# Altium PCB Station-Link.PcbDoc
Units mm, origin at the board's own origin, x right, y up, seen from the top; angles counter-clockwise.
Board outline 84 x 55 mm, 2 copper layers (Top Layer, Bottom Layer); 40 components, 35 nets, 165 pads, 35 vias.
Unrouted connection lines stored in the file: 1.
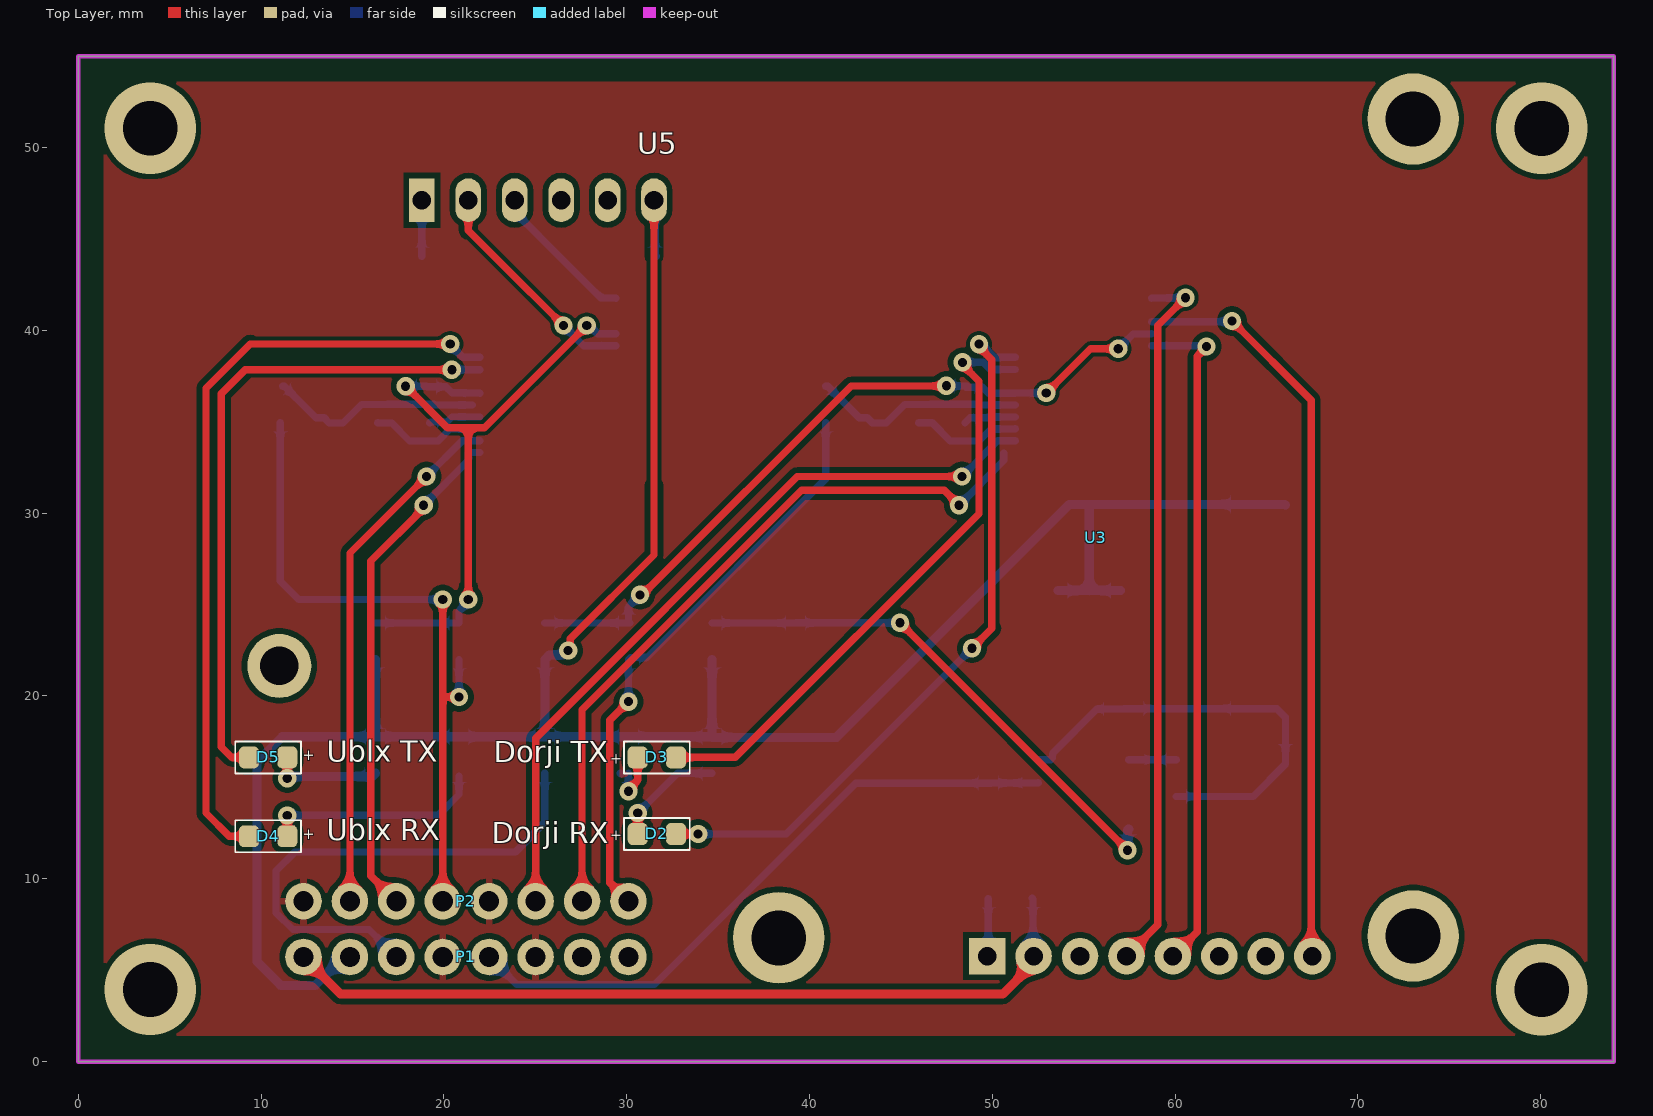
[diagram p0: Top Layer view]
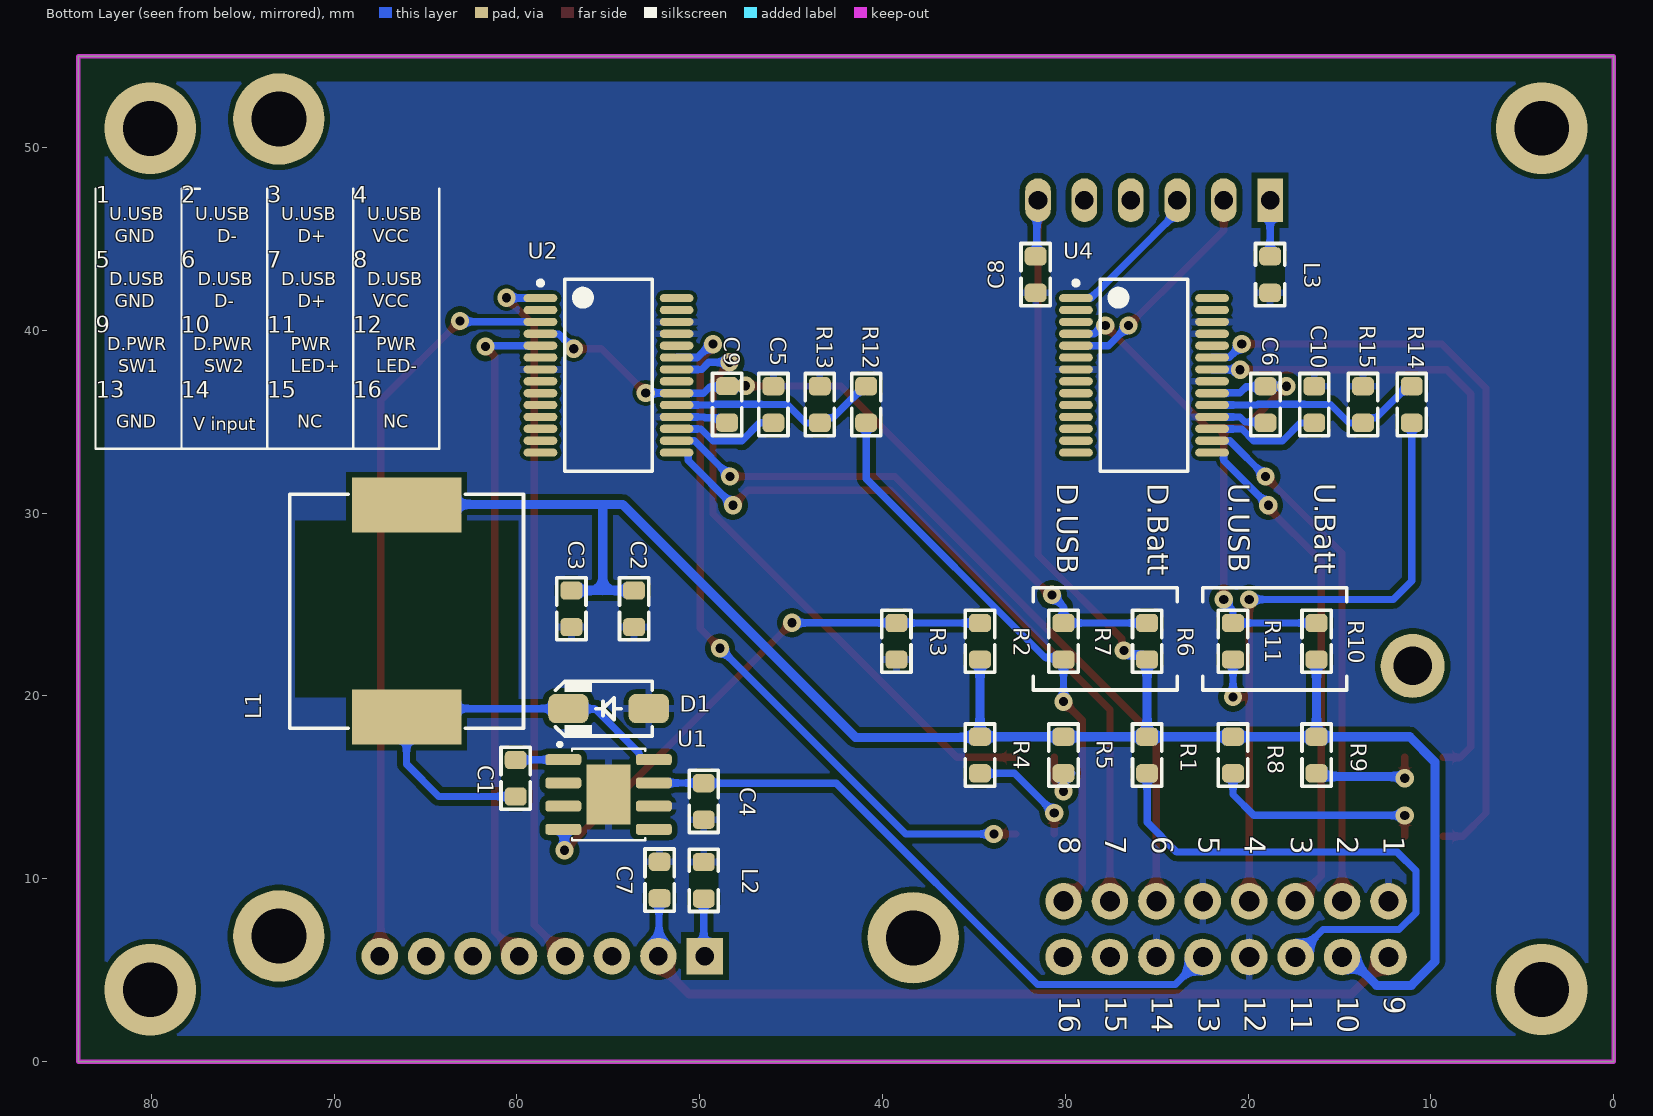
[diagram p1: Bottom Layer view, seen from below]
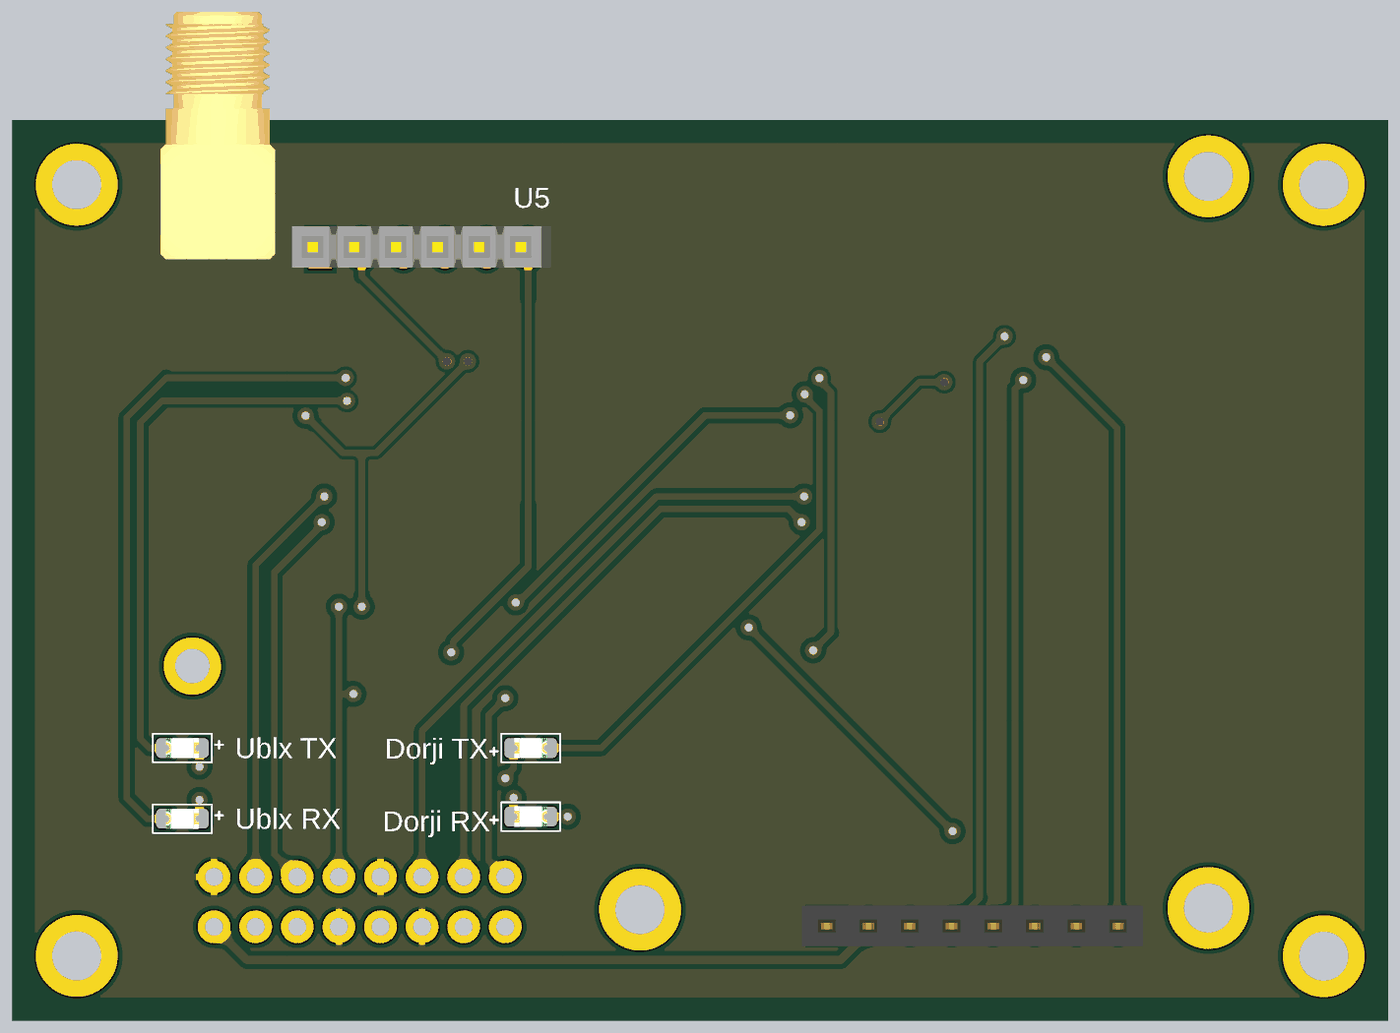
[diagram p2: 3D render of the assembled board from above, using the file's embedded part models]
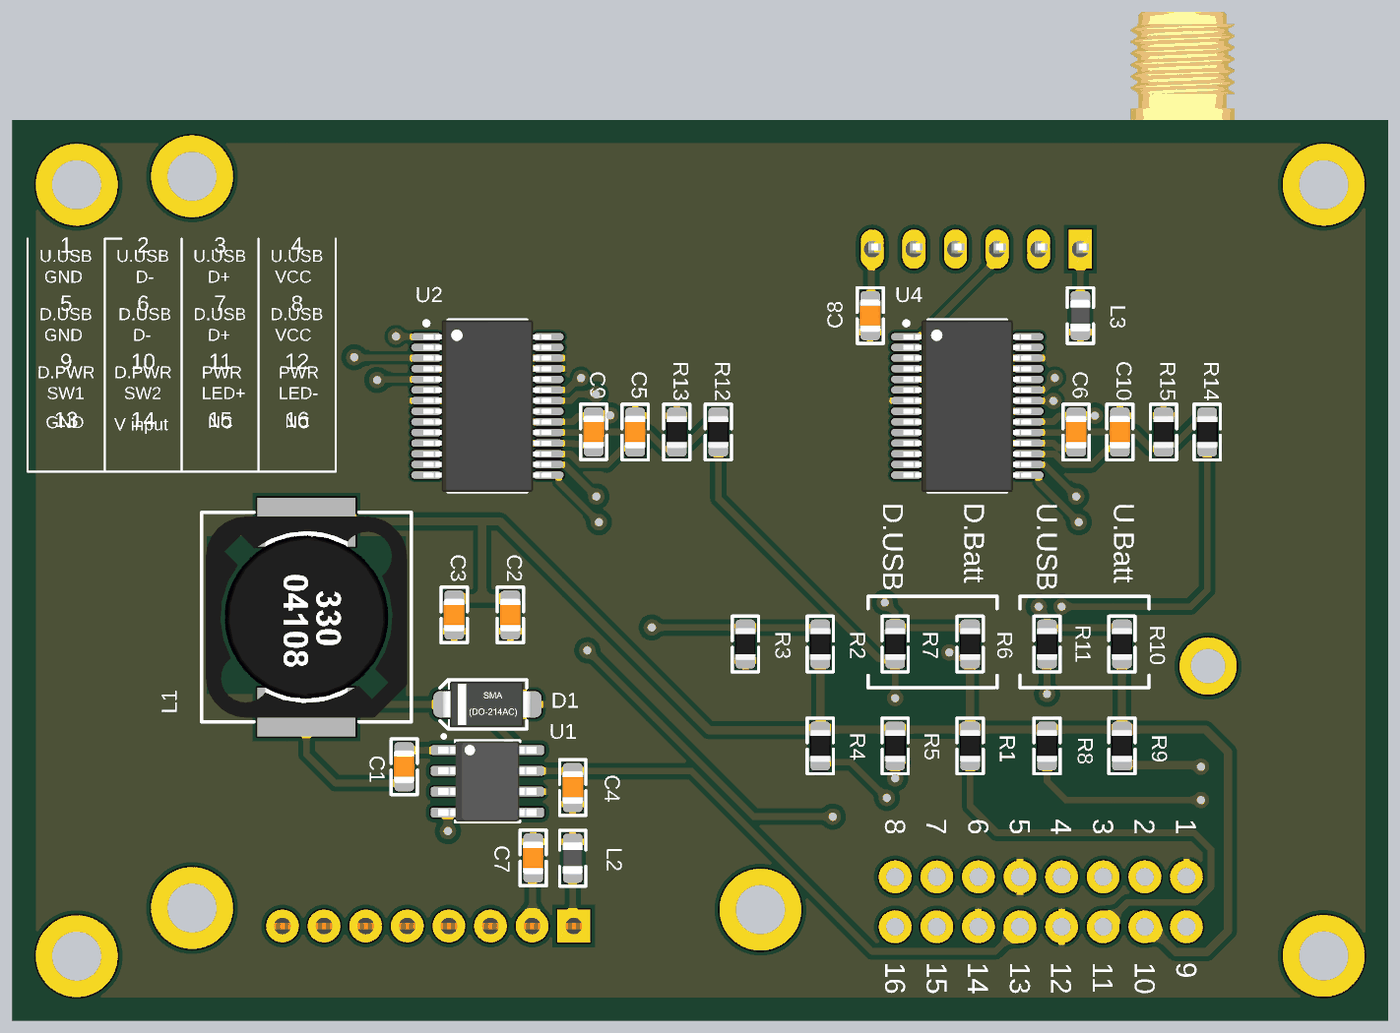
[diagram p3: 3D render of the assembled board from below, using the file's embedded part models]

## Layer stack, top to bottom
Top Solder: solder mask 0.0102, Solder Resist, Dk 3.5
Top Layer: signal copper 0.0356
Dielectric 1: dielectric 0.32, FR-4, Dk 4.8
Bottom Layer: signal copper 0.0356
Bottom Solder: solder mask 0.0102, Solder Resist, Dk 3.5

## Board outline
0,-0.009 0,54.991 84,54.991 84,-0.009

## Design rules (kind name [scope] priority, off if disabled: settings)
Clearance Clearance_1 [TouchesRoom('FT232-1','FT232-2')] p1: gap=0.2 ignorepadtopadclearanceinfootprint=TRUE
Clearance [All] p2: gap=0.3 ignorepadtopadclearanceinfootprint=TRUE
PolygonConnect [All] p1: connectstyle=Relief reliefconductorwidth=0.4 reliefentries=4 polygonreliefangle="90 Angle" airgapwidth=0.254
RoomDefinition FT232-2 [False] p1: confinementstyle=ConfineIn formatcopy=TRUE lockcomponents=FALSE outline 48.641,43.942 60.706,43.942 60.706,31.242 48.641,31.242
RoomDefinition FT232-1 [False] p2: confinementstyle=ConfineIn formatcopy=TRUE lockcomponents=FALSE outline 19.939,44.069 31.877,44.069 31.877,31.496 19.939,31.496
RoutingVias [All] p1: holewidth=0.5 width=1 viastyle="Through Hole" minholewidth=0.5 minwidth=1 maxholewidth=0.5 maxwidth=1
SolderMaskExpansion [All] p1: expansion=0.102 istentingtop=FALSE
Width [All] p1: maxlimit=1 minlimit=0.4 preferedwidth=0.5
30 further rules are at their usual default settings.

## Components (designator, comment, footprint, x,y, rotation, side; value= is the part's Value field where it differs from the comment)
C1 "10nF" C0805 60.071,15.494 r90 bottom
C2 "6.8uF" C0805 53.594,24.765 r90 bottom
C3 "6.8uF" C0805 57.023,24.765 r90 bottom
C4 "10uF" C0805 49.784,14.224 r270 bottom
C5 "0.1uF" C0805 45.974,35.941 r270 bottom
C6 "0.1uF" C0805 19.05,35.941 r90 bottom
C7 "0.1uF" C0805 52.197,9.922 r270 bottom
C8 "0.1uF" C0805 31.623,43.053 r90 bottom
C9 "0.1uF" C0805 48.506,35.949 r90 bottom
C10 "0.1uF" C0805 16.383,35.941 r270 bottom
D1 "1N5822" D_SMA_214AC 54.991,19.304 r0 bottom
D2 "LED_Orange" LED_0805 31.651,12.446 r180 top
D3 "LED_Green" LED_0805 31.651,16.637 r180 top
D4 "LED_Orange" LED_0805 10.386,12.319 r0 top
D5 "LED_Green" LED_0805 10.386,16.637 r0 top
L1 "470uH" RH127_L_12*12*8 66.04,24.638 r90 bottom
L2 "HZ0805G471R-10" IND_HZ0805G471R-10 49.784,9.906 r90 bottom
L3 "HZ0805G471R-10" IND_HZ0805G471R-10 18.796,43.053 r270 bottom
P1 "Header 9" "HEADER 9" 55.753,28.067 r180 top
P2 "Header 9" "HEADER 9" 55.753,31.115 r180 top
R1 "1.5k" R0805 25.527,16.764 r90 bottom
R2 "10K" R0805 34.671,22.987 r270 bottom
R3 "3.24K" R0805 39.243,22.987 r90 bottom
R4 "1.5K" R0805 34.671,16.764 r270 bottom
R5 "1.5K" R0805 30.099,16.764 r270 bottom
R6 "0R" R0805 25.527,22.987 r270 bottom
R7 "0R" R0805 30.099,22.987 r90 bottom
R8 "1.5K" R0805 20.828,16.764 r270 bottom
R9 "1.5K" R0805 16.256,16.764 r270 bottom
R10 "0R" R0805 16.256,22.987 r270 bottom
R11 "0R" R0805 20.828,22.987 r90 bottom
R12 "4.7K" R0805 40.894,35.941 r90 bottom
R13 "10K" R0805 43.434,35.941 r90 bottom
R14 "4.7K" R0805 11.049,35.941 r90 bottom
R15 "10K" R0805 13.716,35.941 r90 bottom
U1 "TPS5430DDAR" SOIC8E 54.991,14.605 r180 bottom
U2 "FT232RL" FTDI-SSOP-28_M 54.991,37.536 r180 bottom locked
U3 "DRF7020D27" DRF7020D27 38.305,6.737 r0 top locked
U4 "FT232RL" FTDI-SSOP-28_M 25.696,37.536 r180 bottom
U5 "UBLOX NEO-M8N" "UBLOX NEO-M8N - customized" 21.246,34.355 r180 top locked

## Footprints (in the part's own frame and the unit in brackets; to place one, negate y for a bottom-side part, rotate by r counter-clockwise, add the part's x,y. Pads: shape width x height; smd on the part's side, far side on the other; paste and mask are expansions set on the pad)
C0805 [mm] "CHIP Capacitor, 2.0X1.3mm, 0805"
  rrect50% 1x1.2 smd mask+0.075: 1(-1,0) 2(1,0)
  Top Layer pour cut-out: -0.5,0.8 0.5,0.8 0.5,-0.8 -0.5,-0.8
  silkscreen extent -1.7,-0.8 1.7,0.8, body extent -1.02,-0.63 1.02,0.64, height 0.65
D_SMA_214AC [mm] "SMA Molded Diode, 2-Leads, Body 4.3x2.7mm"
  rrect50% 2.2x1.6 smd: 1(-2.2,0) 2(2.2,0)
  silkscreen extent -2.4,-1.5 2.9,1.5, body extent -2.7,-1.4 2.8,1.4, height 2.6
DRF7020D27 [mm]
  rect 2x2 hole 1.02: 1(11.42,-0.975)
  round 2 hole 1.02: 2(13.96,-0.975) 3(16.5,-0.975) 4(19.04,-0.975) 5(21.58,-0.975) 6(24.12,-0.975) 7(26.66,-0.975) 8(29.2,-0.975)
  round 5 hole 3: ""(0.02,0.025) ""(34.72,0.125) ""(34.72,44.825)
  body extent -2.5,-2.52 37.5,55.75, height 12.54
FTDI-SSOP-28_M [mm] "SOP, 28-Leads, Body 10.5x5.6mm, Pitch 0.65mm, IPC Low Density"
  oval 1.85x0.45 smd: 1(-3.725,4.225) 2(-3.725,3.575) 3(-3.725,2.925) 4(-3.725,2.275) 5(-3.725,1.625) 6(-3.725,0.975) 7(-3.725,0.325) 8(-3.725,-0.325) 9(-3.725,-0.975) 10(-3.725,-1.625) 11(-3.725,-2.275) 12(-3.725,-2.925) 13(-3.725,-3.575) 14(-3.725,-4.225) 15(3.725,-4.225) 16(3.725,-3.575) 17(3.725,-2.925) 18(3.725,-2.275) 19(3.725,-1.625) 20(3.725,-0.975) 21(3.725,-0.325) 22(3.725,0.325) 23(3.725,0.975) 24(3.725,1.625) 25(3.725,2.275) 26(3.725,2.925) 27(3.725,3.575) 28(3.725,4.225)
  silkscreen extent -3.85,-5.25 2.4,5.25, body extent -3.9,-5.25 3.9,5.25, height 2
"HEADER 9" [mm]
  round 2 hole 1.1: 1(25.654,22.352) 2(28.194,22.352) 3(30.734,22.352) 4(33.274,22.352) 5(35.814,22.352) 6(38.354,22.352) 7(40.894,22.352) 8(43.434,22.352)
IND_HZ0805G471R-10 [mm]
  rrect50% 1x1.2 smd mask+0.075: 1(-1,0) 2(1,0)
  Top Layer pour cut-out: -0.5,0.8 0.5,0.8 0.5,-0.8 -0.5,-0.8
  silkscreen extent -1.7,-0.8 1.7,0.8, body extent -1,-0.63 1,0.63, height 1.05
LED_0805 [mm] "SMD Mono-color Chip LED, body 2.0x1.25mm"
  rrect50% 1.1x1.2 smd: 1(-1.05,0) 2(1.05,0)
  silkscreen extent -1.8,-0.87 1.8,0.87, body extent -1,-0.63 1,0.62, height 0.7
R0805 [mm] "CHIP RESISTOR 1/8 WATT ,2.0X1.3mm, 0805, 2012"
  rrect50% 1x1.2 smd mask+0.05: 1(-1,0) 2(1,0)
  Top Layer pour cut-out: -0.5,0.8 0.5,0.8 0.5,-0.8 -0.5,-0.8
  silkscreen extent -1.7,-0.8 1.7,0.8, body extent -1.02,-0.63 1.02,0.64, height 0.6
RH127_L_12*12*8 [mm] "INDUCTOR, 13.5x12.5mm, DR125, CDRH127, D128C 931AS"
  rect 3x6 smd: 1(-5.8,0) 2(5.8,0)
  Top Layer pour cut-out: -4.699,6.096 4.953,6.096 4.953,-6.096 -4.699,-6.096
  silkscreen extent -6.4,-6.4 6.4,6.4, body extent -6.16,-6.15 6.16,6.15, height 8.16
SOIC8E [mm]
  rrect54% 1.97x0.6 smd: 1(-2.475,1.905) 2(-2.475,0.635) 3(-2.475,-0.635) 4(-2.475,-1.905) 5(2.475,-1.905) 6(2.475,-0.635) 7(2.475,0.635) 8(2.475,1.905)
  rect 2.41x3.3 smd paste-3: 9(0,0)
  silkscreen extent -2.77,-2.5 2,2.84, body extent -3,-2.45 3,2.45, height 1.7
"UBLOX NEO-M8N - customized" [mm]
  rect 1.4x2.4 hole 1.02: 1(2.45,-12.762)
  oval 1.4x2.4 hole 1.02: 2(-0.09,-12.762) 3(-2.63,-12.762) 4(-5.17,-12.762) 5(-7.71,-12.762) 6(-10.25,-12.762)
  round 3.5 hole 2.1: ""(10.25,12.712)
  body extent -12.25,-27.25 12.75,15.21, height 22.36

## Part data
C1 C2 C3 C4 C5 C6 C7 C8 C9 C10: library part "CAP SMD 0805", "CAP 0805", BHK_Group=Capacitor, BHK_NC=no, BHK_SUB_Group=C_805, Data=16-12-2016, Desc.="CAP SMD 0805", Designer="Abbas Basereh"
  C1: BHK_Name=10nF
  C2 C3: BHK_Name=6.8uF
  C4: BHK_Name=10uF
  C5 C6 C7 C8 C9 C10: BHK_Name=0.1uF
D1: library part "1N5819 SMD", "Schottky Rectifiers", Manufacturer="ON Semiconductor/Fairchild", BHK_Group=Diod, BHK_Name=1N5819, BHK_NC=no, BHK_SUB_Group=Shotcky, Data=16-12-2016, Designer="Abbas Basereh", Link=https://www.aliexpress.com/item/Free-shipping-100pcs-1n5822-sma-smd-do-214ac-Schottky-diode-ss34/32337482329.html?spm=2114.01010208.3.1.zLZDsP&ws_ab_test=searchweb0_0,searchweb201602_4_10065_10068_10084_10083_10080_10082_10081_10060_10061_10062_10056_10055_10054_10059_10099_10078_10079_427_10073_10103_10102_10096_10052_10050_10051,searchweb201603_4&btsid=6e50dc92-ac69-45bc-a19e-209af19ce602, Part. No=SS34
D2 D4: library part "LED 0805 Orange", "SMT Mono-color Chip LED Waterclear WL-SMCW, size 0805, Amber, 2 V, 140 deg, 130 mcd", Emitting Color=Amber, Forward Voltage="2 V", Operating Temperature="-40 to 85 degC", Part Number=150080AS75000, BHK_Group=Public_PCB, BHK_Name=Orange, BHK_NC=no, BHK_SUB_Group=LED_805, Chip Technology=AlInGaP, ComponentLink1Description=Manufacturer, ComponentLink1URL=http://www.we-online.de, ComponentLink2Description=Datasheet, ComponentLink2URL=https://katalog.we-online.de/led/datasheet/150080AS75000.pdf, Dominant Wavelength="605 nm", Luminous Intensity="130 mcd", Mounting Technology=SMT, Packaging="Tape and Reel", Peak Wavelength="610 nm", Published Date="November 2018", Publisher="Wurth Elektronik", Size=0805, Viewing Angle="140 deg"
D3 D5: library part "LED 0805 Green", "SMT Mono-color Chip LED Waterclear WL-SMCW, size 0805, Green, 3.2 V, 140 deg, 450 mcd", Emitting Color=Green, Forward Voltage="3.2 V", Operating Temperature="-40 to 85 degC", Part Number=150080GS75000, BHK_Group=Public_PCB, BHK_Name=Green, BHK_NC=no, BHK_SUB_Group=LED_805, Chip Technology=InGaN, ComponentLink1Description=Manufacturer, ComponentLink1URL=http://www.we-online.de, ComponentLink2Description=Datasheet, ComponentLink2URL=https://katalog.we-online.de/led/datasheet/150080GS75000.pdf, Dominant Wavelength="525 nm", Luminous Intensity="450 mcd", Mounting Technology=SMT, Packaging="Tape and Reel", Peak Wavelength="515 nm", Published Date="November 2018", Publisher="Wurth Elektronik", Size=0805, Viewing Angle="140 deg"
L1: library part Inductor, "Inductor", BHK_Group=Self, BHK_Name=33UH, BHK_NC=no, BHK_SUB_Group=Other_Self, Code_IEC=1005, Code_JEITA=0402, LatestRevisionDate=29-May-2009, LatestRevisionNote="IPC-7351 Footprint Added.", PackageDescription="Chip Inductor", PackageReference=0402-A, Published=8-Jun-2000, Publisher="Altium Limited"
L2 L3: "470 Ohms @ 100 MHz 1 Power, Signal Line Ferrite Bead 0805 (2012 Metric) 1A 200mOhm", Package="0805 Laird", Check_prices=https://www.snapeda.com/parts/HZ0805G471R-10/Laird-Signal+Integrity+Products/view-part/?ref=eda, MF="Laird-Signal Integrity", MP=HZ0805G471R-10, SnapEDA_Link=https://www.snapeda.com/parts/HZ0805G471R-10/Laird-Signal+Integrity+Products/view-part/?ref=snap
R1 R2 R3 R4 R5 R6 R7 R8 R9 R10 R11 R12 R13 R14 R15: library part "RES 0805", "Resistor", BHK_Group=Resistor, BHK_NC=no, BHK_SUB_Group=R_805, Data=16-12-2016, Desc.="RES SMD 0805", Designer="Abbas Basereh"
  R1: BHK_Name=1.5k
  R2 R13 R15: BHK_Name=10K
  R3: BHK_Name=3.24K
  R4 R5 R8 R9: BHK_Name=1.5K
  R6 R7 R10 R11: BHK_Name=0R
  R12 R14: BHK_Name=4.7K
U1: "Texas Instruments, TPS5430DDAR Step-Down Switching Regulator 3A Adjustable, 1.22  31 V, 8-Pin SOIC", Manufacturer_Name="Texas Instruments", Mouser Part Number=595-TPS5430DDAR, Arrow Part Number=TPS5430DDAR, Arrow Price/Stock=https://www.arrow.com/en/products/tps5430ddar/texas-instruments?region=nac, BHK_Group=IC, BHK_Name=TPS5430DDAR, BHK_NC=No, BHK_SUB_Group=Regulator, Datasheet Link=http://www.ti.com/lit/gpn/tps5430, Geometry.Height=1.7mm, Manufacturer_Part_Number=TPS5430DDAR, Mouser Price/Stock=https://www.mouser.co.uk/ProductDetail/Texas-Instruments/TPS5430DDAR?qs=zwk82MlA57ZJdOTovH1aYA%3D%3D
U2 U4: library part CMP-2000-05029-1, "IC USB FS SERIAL UART 28-SSOP", Manufacturer=FTDI, Maximum Operating Temperature=+85degC, Minimum Operating Temperature=-40degC, Package Type=SSOP, Datasheet URL=http://datasheet.octopart.com/FT232RL-FTDI-datasheet-120501.pdf, Datasheet Version="Rev. 1.04, 02/2006", Dimensions=10.2x5.3x1.75mm, Height=1.75mm, Length=10.2mm, Manufacturer URL=http://www.ftdichip.com/, Maximum Data Rate=3MBd, Mounting Type=SurfaceMount, Number of Channels per Chip=1, Pin Count=28, Receive FIFO=256B, Transmit FIFO=128B, Width=5.3mm
U3: "DRF7020D27 is a low-cost sub-1 GHz transceiver module", BHK_Group=Module, BHK_Name=DRF7020D27, BHK_NC=NO, BHK_SUB_Group=RF
U5: library part "UBLOX NEO-M8N_customized", BHK_Group=Module, BHK_Name="UBLOX NEO-M8N", BHK_NC=NO, BHK_SUB_Group=GPS

## Via types
v1: diameter 1, hole 0.5, Top Layer to Bottom Layer, tented both sides, 31 vias
v2: diameter 5, hole 3, Top Layer to Bottom Layer, 4 vias

## Nets (pads, with @x,y where several pads share a name; then routed paths per layer and width w, separated by ;. In a path a pad name is that pad's centre, name@x,y a point inside that pad or via, vN(x,y) a via of type N, cw(c..) or ccw(c..) an arc to the next point about the centre after c; other vN are vias at no path point)
"Dorji power Sw1": C2.2 C3.2 C8.2 L1.2 P1.7 R1.2 R2.2 R4.1 R5.1 R6.2 R8.1 R9.1 R10.2 U5.6 | length 131.3
  Top Layer w0.4: v1(26.797,22.479) 26.912,22.594 26.912,23.119 31.496,27.703 31.496,31.496 31.496,44.069 U5.6
  Bottom Layer w0.4: U5.6 31.559,47.054 31.559,44.116 C8.2
  Bottom Layer w0.5: P1.7 14.511,5.715 12.961,4.165 11.075,4.165 9.779,5.461 9.779,16.383 11.16,17.764 R9.1 ; R10.2 R9.1 ; v1(26.797,22.479) 26.662,22.479 26.42,22.237 25.777,22.237 R6.2 R1.2 ; R4.1@34.671,17.733 41.482,17.733 54.229,30.48 55.245,30.48 ; R2.2 R4.1 R5.1 R1.2 ; C2.2 55.308,25.765 ; C3.2 55.308,25.765 ; L1.2 65.998,30.48 55.245,30.48 ; R9.1 R8.1 R1.2 ; 55.245,30.48 55.308,30.416 55.308,25.765
"Dorji power Sw2": C7.2 P1.8 U3.2 | length 45.1
  Top Layer w0.5: P1.8 14.351,3.683 50.565,3.683 52.265,5.383 U3.2
  Bottom Layer w0.4: C7.2 52.231,8.888 52.231,5.796 U3.2
"Dorji RX": U2.1 U3.4 | length 39.2
  Top Layer w0.4: U3.4 59.055,7.472 59.055,40.259 v1(60.579,41.783)
  Bottom Layer w0.4: U2.1 58.726,41.771 60.567,41.771 v1(60.579,41.783)
"Dorji RX LED": D2.1 U2.23 | length 40.1
  Top Layer w0.4: D2.1 v1(33.909,12.446) ; v1(48.895,22.606) 49.976,23.687 49.976,38.387 49.276,39.087 v1(49.276,39.243)
  Bottom Layer w0.4: v1(33.909,12.446) 38.735,12.446 v1(48.895,22.606) ; v1(49.276,39.243) 49.387,39.243 50.109,38.521 51.256,38.521 U2.23
"Dorji TX": U2.5 U3.5 | length 37.1
  Top Layer w0.4: U3.5 61.214,7.091 61.214,38.582 61.722,39.09 v1(61.722,39.116)
  Bottom Layer w0.4: U2.5 61.087,39.161 61.677,39.161 v1(61.722,39.116)
"Dorji TX LED": D3.1 U2.22 | length 33.8
  Top Layer w0.4: D3.1 35.941,16.637 49.276,29.972 49.276,31.115 49.276,37.211 48.376,38.111 v1(48.376,38.249)
  Bottom Layer w0.4: v1(48.376,38.249) 49.508,38.249 49.896,37.861 U2.22
"Dorji USB D+": P2.2 U2.15 | length 40.3
  Top Layer w0.4: P2.2 27.559,19.238 39.563,31.242 47.378,31.242 v1(48.188,30.432)
  Bottom Layer w0.4: v1(48.188,30.432) 50.633,32.878 U2.15@50.633,33.288
"Dorji USB D-": P2.3 U2.16 | length 41.8
  Top Layer w0.4: P2.3@25.019,8.9 25.019,17.688 39.335,32.004 v1(48.345,32.004)
  Bottom Layer w0.4: v1(48.345,32.004) 50.292,33.951 51.256,33.951 U2.16
"Dorji USB VCC": P2.1 R7.1 R12.1 | length 32
  Top Layer w0.4: P2.1 29.083,9.779 29.083,18.669 v1(30.099,19.685)
  Bottom Layer w0.4: v1(30.099,19.685) R7.1 30.21,22.098 31.115,22.098 40.894,31.877 R12.1
GND: C2.1 C3.1 C4.2 C5.1 C6.1 C7.1 C8.1 C9.1 C10.1 D1.1 L2.2 L3.2 P1.3 P1.5 P2.4 P2.8 R3.1 R13.2 R15.2 U1.6 U1.9 U2.7 U2.18 U2.21 U2.25 U2.26 U4.7 U4.18 U4.21 U4.25 U4.26 | length 6.2
  Bottom Layer w0.4: C6.1@19.219,34.941 19.266,34.988 19.981,34.988 20.173,34.988 20.446,35.261 U4.18 ; P1.3 P1.3@25.325,5.409 ; C9.1@48.514,34.941 48.641,35.068 48.791,35.218 49.706,35.218 49.741,35.253 51.258,35.253 U2.18
NetC1_1: C1.1 D1.2 L1.1 U1.8 | length 24.3
  Bottom Layer w0.4: U1.8 53.201,16.51 53.301,16.61 53.301,16.805 53.34,16.844 53.34,16.895 55.725,19.28 57.167,19.28 D1.2 65.574,19.304 L1.1 66.04,16.256 64.278,14.494 C1.1
NetC1_2: C1.2 U1.1 | length 2.6
  Bottom Layer w0.4: U1.1 57.474,16.502 C1.2@60.063,16.502
NetC5_2: C5.2 U2.17 | length 6
  Bottom Layer w0.4: C5.2 46.72,34.941 47.712,33.949 49.278,33.949 49.93,34.601 51.256,34.601 U2.17
NetC6_2: C6.2 R10.1 R11.2 U4.4 U4.20 | length 34.7
  Top Layer w0.4: v1(17.907,36.941) 17.923,36.941 20.193,34.671 21.336,34.671 ; v1(21.336,25.273) 21.336,34.671 ; v1(27.814,40.26) 22.225,34.671 21.336,34.671
  Bottom Layer w0.4: R10.1 R11.2 20.828,24.638 21.336,25.146 v1(21.336,25.273) ; v1(17.907,36.941) C6.2 19.078,36.913 20.11,36.913 20.442,36.581 21.215,36.581 21.226,36.571 21.961,36.571 U4.20@21.981,36.551 ; v1(27.814,40.26) 27.974,40.26 28.414,39.821 29.411,39.821 U4.4
NetC9_2: C9.2 R6.1 R7.2 U2.4 U2.20 | length 40.6
  Top Layer w0.4: v1(30.734,25.527) 30.861,25.527 42.291,36.957 v1@47.371,36.957 ; v1(52.959,36.576) 55.372,38.989 v1(56.896,38.989)
  Bottom Layer w0.4: R6.1 29.947,23.987 R7.2@30.172,23.987 ; R7.2 30.099,24.892 v1(30.734,25.527) ; v1(47.49,36.965) 47.498,36.957 C9.2@48.625,36.957 ; C9.2@48.563,36.892 49.468,36.892 49.799,36.561 U2.20 51.273,36.568 52.951,36.568 v1(52.959,36.576) ; v1(56.896,38.989) 57.708,39.801 58.706,39.801 U2.4
NetC10_2: C10.2 U4.17 | length 6
  Bottom Layer w0.4: C10.2 16.399,34.925 17.145,34.925 18.121,33.949 19.687,33.949 20.339,34.601 21.665,34.601 U4.17@21.675,34.611
NetD2_2: D2.2 R4.2 | length 6.1
  Top Layer w0.4: D2.2 30.604,12.449 30.604,13.586 v1(30.607,13.589)
  Bottom Layer w0.4: v1(30.607,13.589) 32.782,15.764 R4.2
NetD3_2: D3.2 R5.2 | length 3.1
  Top Layer w0.4: v1(30.099,14.786) 30.099,14.894 30.601,15.396 D3.2
  Bottom Layer w0.4: R5.2@29.654,15.764 R5.2@29.671,15.747 ; v1(30.099,14.786) R5.2
NetD4_2: D4.2 R8.2 | length 12
  Top Layer w0.4: v1(11.43,13.462) 11.433,13.459 11.433,12.322 D4.2
  Bottom Layer w0.4: v1(11.43,13.462) 19.685,13.462 20.828,14.605 R8.2@20.828,15.604
NetD5_2: D5.2 R9.2 | length 6.1
  Top Layer w0.4: v1(11.43,15.494) 11.433,15.497 11.433,16.634 D5.2
  Bottom Layer w0.5: v1(11.43,15.494) 11.526,15.59 16.082,15.59 R9.2
NetL2_1: L2.1 U3.1 | length 3.2
  Bottom Layer w0.4: U3.1 49.784,5.821 L2.1
NetL3_1: L3.1 U5.1 | length 3.1
  Bottom Layer w0.4: L3.1 U5.1
NetR2_1: R2.1 R3.2 U1.4 | length 29.1
  Top Layer w0.4: v1(44.958,24.003) v1(57.404,11.557)
  Bottom Layer w0.4: R2.1 R3.2 39.251,23.995 44.95,23.995 v1(44.958,24.003)
  Bottom Layer w0.5: v1(57.404,11.557) 57.404,12.65 57.454,12.7 U1.4
NetR12_2: R12.2 R13.1 U2.19 | length 11.6
  Bottom Layer w0.4: R12.2 40.994,36.941 42.725,35.21 43.165,35.21 R13.1 43.45,34.925 44.196,34.925 45.212,35.941 46.635,35.941 46.643,35.949 49.175,35.949 49.213,35.911 U2.19
NetR14_2: R14.2 R15.1 U4.19 | length 11.6
  Bottom Layer w0.4: R14.2@11.176,36.941 11.276,36.941 13.007,35.21 13.447,35.21 R15.1 13.732,34.925 14.478,34.925 15.494,35.941 16.917,35.941 16.925,35.949 19.457,35.949 19.495,35.911 U4.19@21.548,35.911
"Power LED+": P1.6 R1.1 | length 28.4
  Bottom Layer w0.4: P1.6 15.899,7.215 11.746,7.215 10.819,8.142 10.819,10.438 11.835,11.454 23.9,11.454 25.527,13.081 R1.1
"RTS SET": U2.3 U3.8 | length 41
  Top Layer w0.4: v1(63.119,40.513) 67.45,36.182 67.45,5.817 U3.8
  Bottom Layer w0.4: U2.3 58.726,40.471 63.077,40.471 v1(63.119,40.513)
"Ublox RX": U4.1 U5.3 | length 8.1
  Bottom Layer w0.4: U5.3 23.876,46.482 26.543,43.815 28.587,41.771 29.411,41.771 U4.1
"Ublox RX LED": D4.1 U4.23 | length 42.4
  Top Layer w0.4: D4.1 8.255,12.319 6.985,13.589 6.985,36.83 9.408,39.253 20.066,39.253 v1(20.351,39.253)
  Bottom Layer w0.4: v1(20.351,39.253) 20.351,39.198 21.028,38.521 21.961,38.521 U4.23
"Ublox TX": U4.5 U5.2 | length 12.3
  Top Layer w0.4: U5.2 21.336,45.466 22.987,43.815 v1(26.542,40.26)
  Bottom Layer w0.4: v1(26.542,40.26) 27.641,39.161 U4.5
"Ublox TX LED": D5.1 U4.22 | length 35.8
  Top Layer w0.4: D5.1 8.382,16.637 7.82,17.199 7.82,36.522 9.139,37.841 20.066,37.841 v1(20.437,37.841)
  Bottom Layer w0.4: v1(20.437,37.841) 20.448,37.851 21.955,37.851 U4.22@21.964,37.861
"Ublox USB D+": P2.6 U4.15 | length 28
  Top Layer w0.4: P2.6 16.002,10.16 16.002,27.379 18.893,30.27 v1(18.893,30.432)
  Bottom Layer w0.4: v1(18.893,30.432) 21.338,32.878 21.338,33.288 21.361,33.311 U4.15
"Ublox USB D-": P2.7 U4.16 | length 28.6
  Top Layer w0.4: P2.7@14.859,8.914 14.859,27.813 v1(19.05,32.004)
  Bottom Layer w0.4: v1(19.05,32.004) 20.997,33.951 21.961,33.951 U4.16
"Ublox USB VCC": P2.5 R11.1 R14.1 | length 37.6
  Top Layer w0.4: P2.5 19.939,19.812 ; v1(19.939,25.273) 19.939,19.812 ; v1@20.713,19.824 v1(20.828,19.939) 20.066,19.939 19.939,19.812
  Bottom Layer w0.4: R14.1 11.049,26.289 12.065,25.273 v1(19.939,25.273) ; v1(20.828,19.939) R11.1
VCC: C4.1 P1.4 U1.7 | length 35.2
  Bottom Layer w0.4: P1.4 23.979,4.215 31.52,4.215 42.529,15.224 49.911,15.224 49.919,15.232 52.508,15.232 U1.7
pads on no net: P1.1 P1.2 U1.2 U1.3 U1.5 U2.2 U2.6 U2.8 U2.9 U2.10 U2.11 U2.12 U2.13 U2.14 U2.24 U2.27 U2.28 U3. U3.3 U3.6 U3.7 U4.2 U4.3 U4.6 U4.8 U4.9 U4.10 U4.11 U4.12 U4.13 U4.14 U4.24 U4.27 U4.28 U5. U5.4 U5.5
copper on no net:
  other v2: 80.066,3.92 3.937,3.937 3.937,51.054 80.068,51.05

## Polygon pours and split planes (outlines as drawn)
GND on Bottom Layer "NONET_L-01_P-001" (solid, remove dead copper, pour order 2): 1.397,1.397 82.55,1.397 82.55,53.594 1.397,53.594
GND on Top Layer "NONET_L-01_P-001" (solid, remove dead copper, pour order 3): 1.397,1.397 82.55,1.397 82.55,53.594 1.397,53.594

## Keep-outs
Keep-Out Layer:
  the board outline again, w0.254

## Silkscreen, mask and mechanical layers (free items; w line width, h text height)
Top Overlay:
  text "Ublx TX" at 13.589,16.024 h2
  text "Dorji TX" at 22.733,15.997 h2
  text "Ublx RX" at 13.589,11.706 h2
  text "Dorji RX" at 22.606,11.552 h2
Bottom Overlay:
  lines w0.127: 64.262,47.752 64.262,44.196 64.262,40.64 64.262,37.084 64.262,33.528 68.961,33.528 ; 68.961,47.752 68.961,44.196 68.961,40.64 68.961,37.084 68.961,33.528 ; 73.66,47.752 73.66,44.196 73.66,40.64 73.66,37.084 73.66,33.528 ; 77.343,47.752 78.359,47.752 78.359,44.196 78.359,40.64 78.359,37.084 78.359,33.528 ; 83.058,47.752 83.058,33.528 73.66,33.528 ; 68.961,33.528 73.66,33.528
  lines w0.2: 14.605,21.082 14.605,20.32 22.479,20.32 22.479,21.082 ; 14.605,25.146 14.605,25.908 22.479,25.908 22.479,25.146 ; 23.876,21.082 23.876,20.32 31.75,20.32 31.75,21.082 ; 23.876,25.146 23.876,25.908 31.75,25.908 31.75,25.146
  text "4" at 68.961,46.672 h1.52
  text "3" at 73.66,46.672 h1.52
  text "2" at 78.359,46.672 h1.52
  text "1" at 83.058,46.672 h1.52
  text "U.USB /  VCC" at 68.199,44.577 h1.2
  text "U.USB /    D+" at 72.898,44.577 h1.2
  text "U.USB /     D-" at 77.597,44.577 h1.2
  text "U.USB /  GND" at 82.296,44.577 h1.2
  text "8" at 68.961,43.116 h1.52
  text "7" at 73.66,43.116 h1.52
  text "6" at 78.359,43.116 h1.52
  text "5" at 83.058,43.116 h1.52
  text "D.USB /  VCC" at 68.199,41.021 h1.2
  text "D.USB /    D+" at 72.898,41.021 h1.2
  text "D.USB /    D-" at 77.47,41.021 h1.2
  text "D.USB /  GND" at 82.296,41.021 h1.2
  text "12" at 68.961,39.56 h1.52
  text "11" at 73.66,39.56 h1.52
  text "10" at 78.359,39.56 h1.52
  text "9" at 83.058,39.56 h1.52
  text "PWR / LED-" at 67.691,37.465 h1.2
  text "PWR / LED+" at 72.39,37.465 h1.2
  text "D.PWR /   SW2" at 77.724,37.465 h1.2
  text "D.PWR /   SW1" at 82.423,37.465 h1.2
  text "16" at 68.961,36.005 h1.52
  text "15" at 73.66,36.005 h1.52
  text "14" at 78.359,36.005 h1.52
  text "13" at 83.058,36.005 h1.52
  text "NC" at 67.31,34.417 h1.2
  text "NC" at 72.009,34.417 h1.2
  text "GND" at 81.915,34.417 h1.2
  text "V input" at 77.724,34.29 h1.2
  text "U.Batt" at 16.742,31.623 h2 r90
  text "U.USB" at 21.441,31.623 h2 r90
  text "D.Batt" at 25.888,31.623 h2 r90
  text "D.USB" at 30.839,31.623 h2 r90
  text "1" at 12.954,12.319 h2 r90
  text "2" at 15.494,12.321 h2 r90
  text "3" at 18.012,12.319 h2 r90
  text "4" at 20.574,12.319 h2 r90
  text "5" at 23.092,12.319 h2 r90
  text "6" at 25.632,12.319 h2 r90
  text "7" at 28.194,12.319 h2 r90
  text "8" at 30.712,12.319 h2 r90
  text "9" at 12.932,3.556 h2 r90
  text "10" at 15.472,3.556 h2 r90
  text "11" at 18.034,3.556 h2 r90
  text "12" at 20.574,3.556 h2 r90
  text "13" at 23.092,3.556 h2 r90
  text "14" at 25.654,3.556 h2 r90
  text "15" at 28.172,3.556 h2 r90
  text "16" at 30.712,3.556 h2 r90

## Text inside footprints (layer, text, board x,y; h text height)
D2: Top Overlay "+" at 29.176,12.696 h0.6 r270
D3: Top Overlay "+" at 29.176,16.887 h0.6 r270
D4: Top Overlay "+" at 12.861,12.069 h0.6 r90
D5: Top Overlay "+" at 12.861,16.387 h0.6 r90